# Altium PCB Template2.PcbDoc (part 2 of 2)
Units mm, origin at the board's own origin, x right, y up, seen from the top; angles counter-clockwise.
Board outline 93 x 70 mm, 4 copper layers (Top Layer, InternalPlane1, InternalPlane2, Bottom Layer), stack 1.963 mm thick; 187 components, 125 nets, 602 pads, 560 vias.
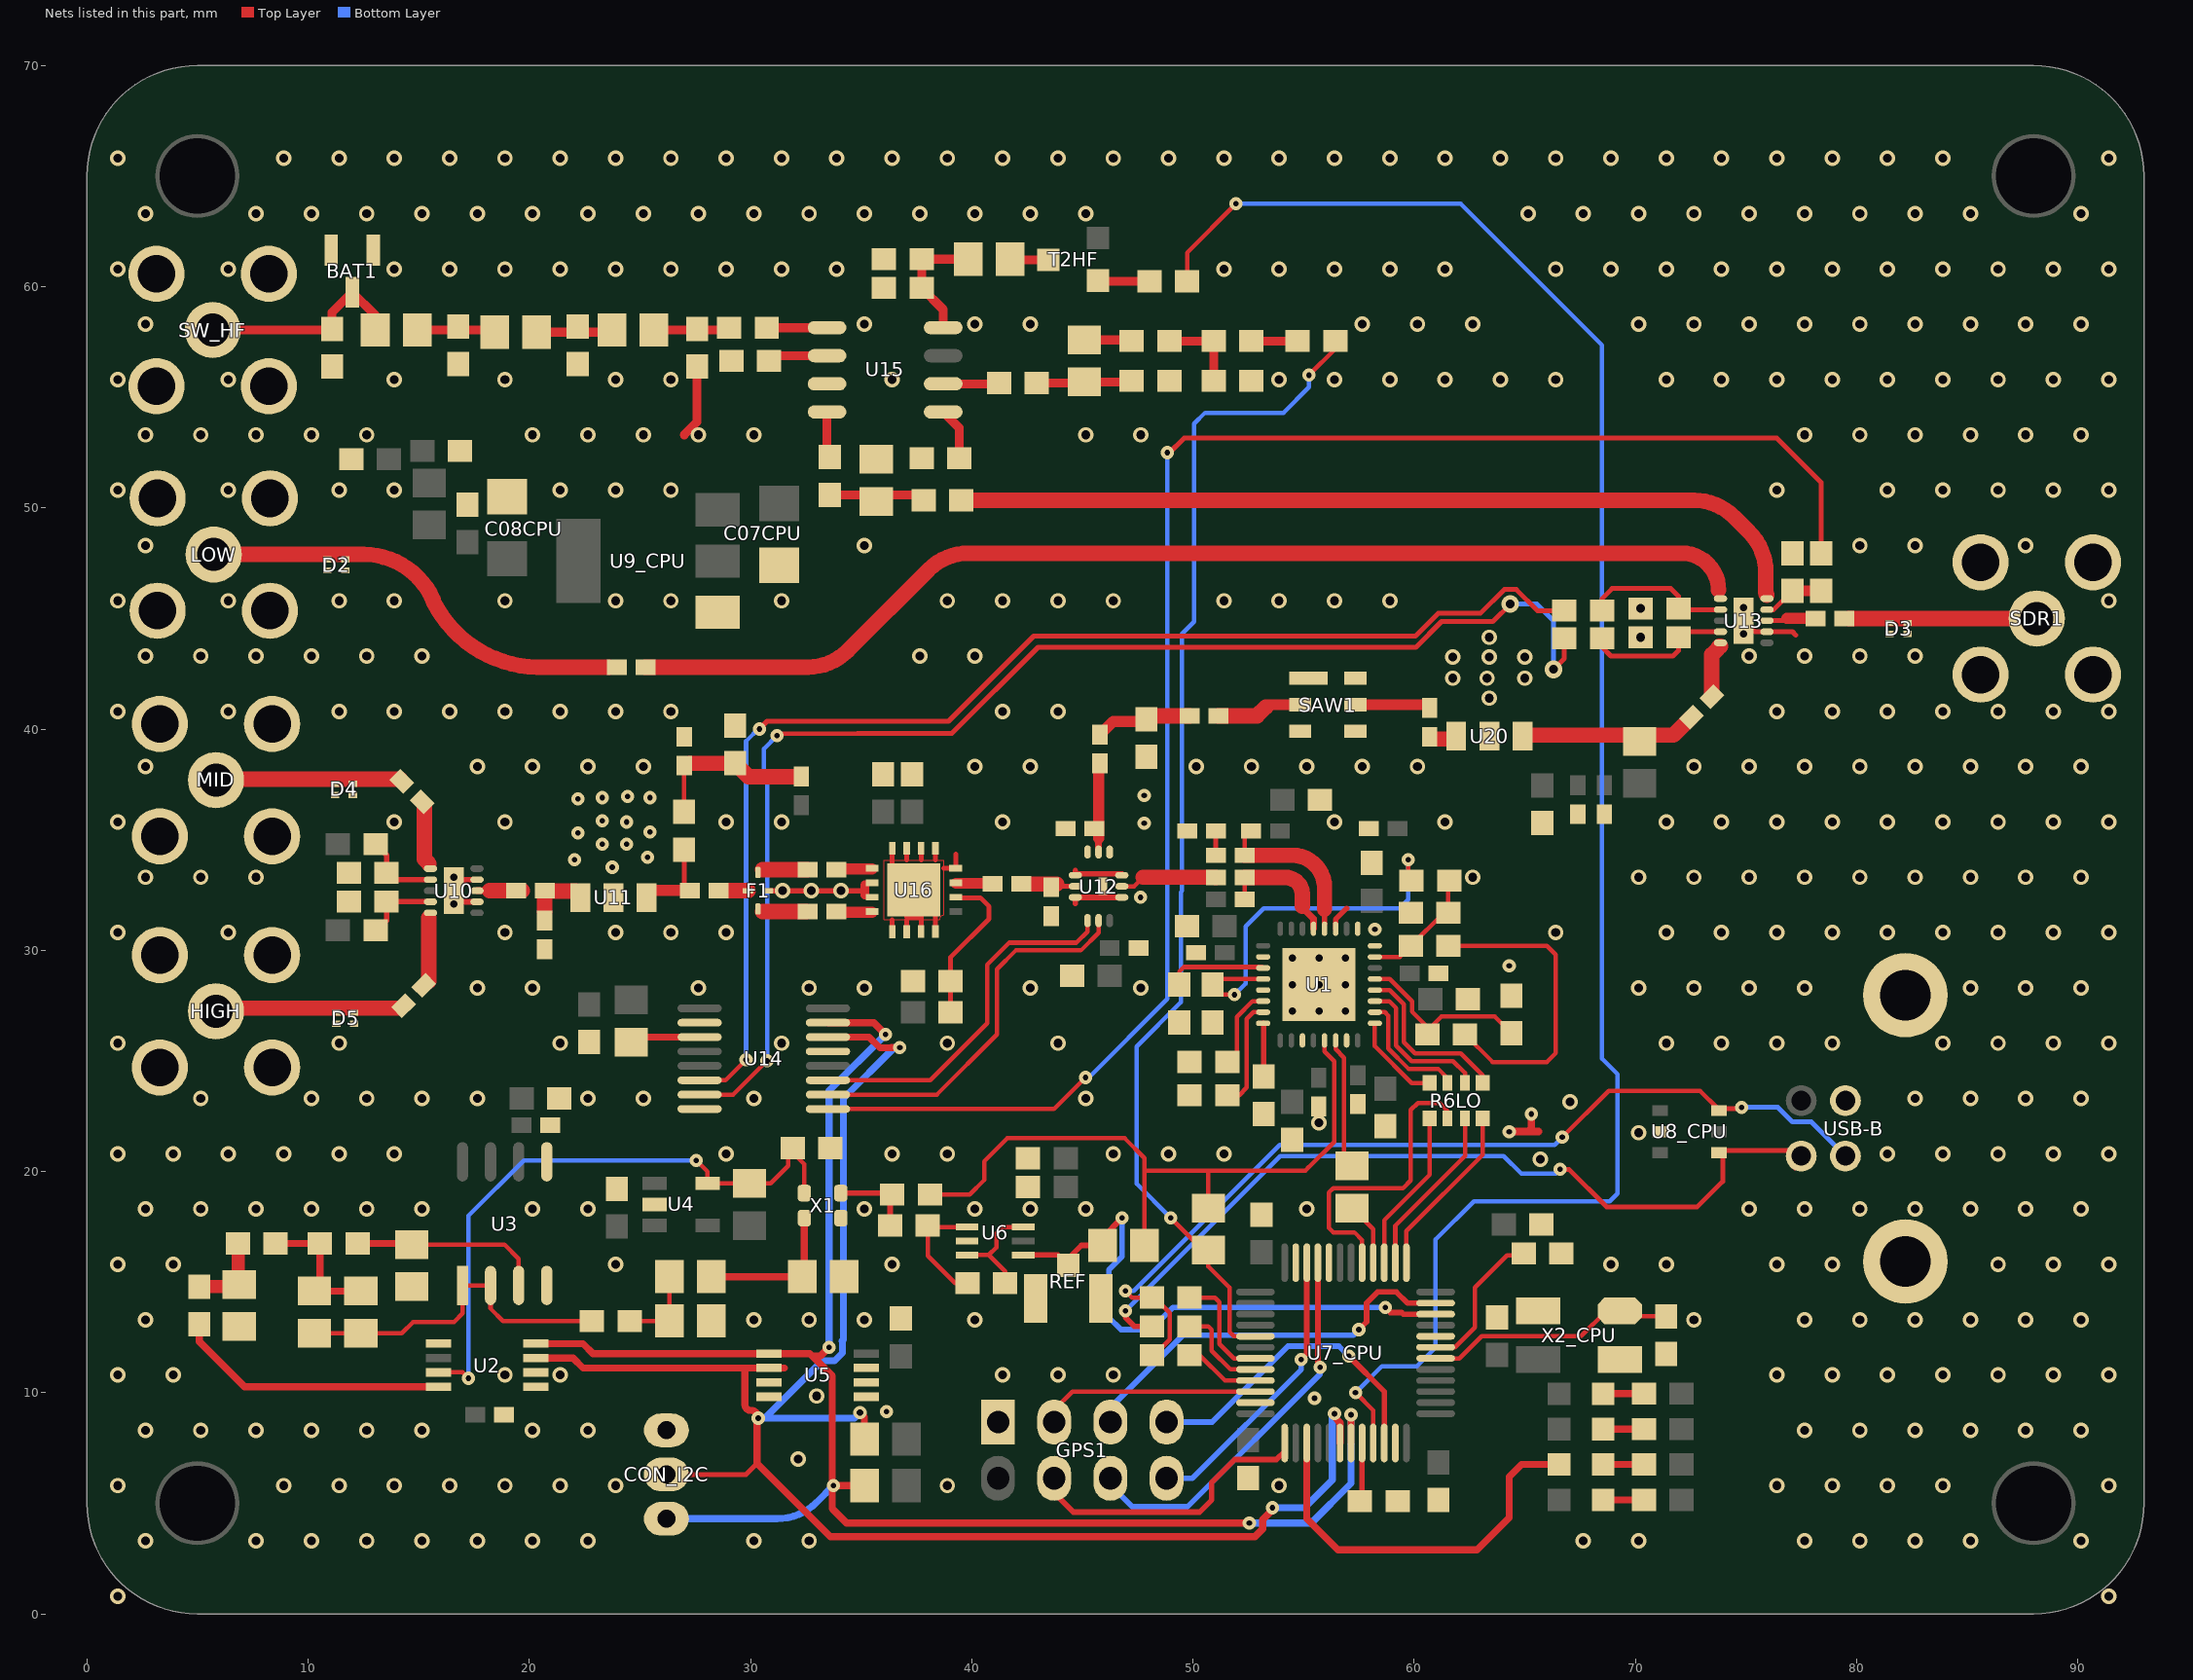
[diagram p4: the nets of this part, all layers, seen from the top]

## Via types
v1: diameter 0.7, hole 0.4, Top Layer to Bottom Layer, 458 vias
v2: diameter 0.6, hole 0.25, Top Layer to Bottom Layer, 82 vias
v3: diameter 0.66, hole 0.33, Top Layer to Bottom Layer, tented top, 13 vias
v4: diameter 1.27, hole 0.711, Top Layer to Bottom Layer, 3 vias
v5: diameter 0.8, hole 0.4, Top Layer to Bottom Layer, 2 vias
v6: diameter 0.6, hole 0.3, Top Layer to Bottom Layer, 2 vias

## Nets (pads, with @x,y where several pads share a name; then routed paths per layer and width w, separated by ;. In a path a pad name is that pad's centre, name@x,y a point inside that pad or via, vN(x,y) a via of type N, cw(c..) or ccw(c..) an arc to the next point about the centre after c; other vN are vias at no path point) (continued)
CPU_OSC_OUT: C05CPU.2 U7_CPU.6 X2_CPU.1 | length 10.8
  Top Layer w0.2: U7_CPU.6@60.975,11.55 62.05,11.55 63.05,12.55 67.55,12.55 X2_CPU.1@68.7,13.7 ; X2_CPU.1@69.3,13.7 69.55,13.45 C05CPU.2@71.4,13.45
CPU_RX: GPS1.8 U7_CPU.22 | length 13.1
  Top Layer w0.25: v2(54.9,11.5) 55.15,11.75 U7_CPU.22@55.15,15.875
  Bottom Layer w0.25: GPS1.8@48.81,6.13 49.98,6.13 54.9,11.05 v2(54.9,11.5)
CPU_SCL: CON_I2C.2 R040LO.1 U2.3 U5.2 U7_CPU.42 U14.14 | length 82.8
  Top Layer w0.22: CON_I2C.2@26.2,6.3 29.8,6.3 30.3,6.8
  Top Layer w0.32: U2.3@20.286,11.567 21.983,11.567 22.433,11.117 29.75,11.117 ; v2@30.3,8.85 30.3,6.8 33.61,3.49 52.803,3.49 53.16,3.847 53.16,4.26 53.6,4.7 v2(53.6,4.8) ; v2(30.35,8.85) ccw(c30,8.85) 30,9.2 cw(c30,9.45) 29.75,9.45 29.75,11.117 ; 31.533,11.117 U5.2@30.836,11.117 29.75,11.117 ; U14.14@33.5,26.075 35.362,26.075 35.847,25.59 36.353,25.59 36.363,25.6 v2(36.75,25.6) ; v6(34.95,9.1) 35.15,8.9 R040LO.1@35.15,7.9 ; v2(56.4,9.049) 56.4,8.887 56.65,8.637 U7_CPU.42@56.65,7.725
  Bottom Layer w0.32: v2(30.35,8.85) 30.65,8.85 ; v6(34.95,9.1) 34.7,8.85 30.65,8.85 ; v2(36.75,25.6) 36.5,25.6 34.2,23.3 34.2,12.4 34.131,12.331 34.16,12.303 34.16,11.797 33.803,11.44 33.297,11.44 33.269,11.469 30.65,8.85 ; v2(53.6,4.8) 55.05,4.8 56.3,6.05 v2@56.3,9
CPU_SDA: CON_I2C.1 R041LO.2 U2.4 U5.1 U7_CPU.43 U14.15 | length 76.9
  Top Layer w0.32: U2.4@20.286,12.218 22.432,12.218 22.883,11.767 U5.1@30.836,11.767 32.683,11.767 32.8,11.65 ; U14.15@33.5,26.725 35.575,26.725 v2(36.1,26.2) ; v2(33.55,12.05) 33.15,11.65 32.8,11.65 ; R041LO.2@35.15,5.8 v2@33.7,5.8 ; v2(52.55,4.1) 34.35,4.1 33.7,4.75 v2@33.7,5.8 ; U7_CPU.43@57.15,7.725 v2@57.15,8.799 ; 32.8,11.65 33.7,10.75 v2@33.7,5.8
  Bottom Layer w0.32: CON_I2C.1@26.2,4.3 31.198,4.3 ccw(c31.198,6.84) 32.994,5.044 v2(33.75,5.8) ; v2(33.55,12.05) 33.55,23.65 v2(36.1,26.2) ; v2(52.55,4.1) 55.35,4.1 57.15,5.9 v2@57.15,8.799
  other v2: 57.15,9
CPU_TX: GPS1.6 U7_CPU.21 | length 17.8
  Top Layer w0.25: U7_CPU.21@55.65,15.875 55.65,11.25 v2(55.75,11.15)
  Bottom Layer w0.25: GPS1.6@46.27,6.13 46.27,5.83 47.261,4.839 49.75,4.839 55.75,10.839 v2(55.75,11.15)
CPU_USB_LED: U7_CPU.39 USB.2 | length 18.1
  Top Layer w0.32: U7_CPU.39@55.15,7.725 55.15,4.3 56.55,2.9 62.85,2.9 64.3,4.35 64.3,6.2 64.854,6.754 USB.2@66.555,6.754
CS_PLL: R6LO.5 U7_CPU.14 | length 7.8
  Top Layer w0.2: U7_CPU.14@59.15,15.875 59.15,17.55 62.3,20.7 R6LO.5@62.3,22.4
DAC_VOUT: R014LO.1 U2.8 | length 12.4
  Top Layer w0.32: R014LO.1@5.086,13.092 5.086,12.314 7.134,10.266 U2.8@15.886,10.266
DAC_VOUT_FILTER1: C027LO.2 R014LO.2 R015LO.1 | length 3.7
  Top Layer w0.6: R014LO.2@5.086,14.792 6.786,14.792 6.836,14.842 R015LO.1@6.836,16.742
DAC_VOUT_FILTER2: C021LO.2 C024LO.2 R015LO.2 R016LO.1 | length 6.4
  Top Layer w0.32: R015LO.2@8.536,16.742 R016LO.1@10.536,16.742 10.536,14.842 C021LO.2@10.286,14.592 C024LO.2@12.386,14.592
DAC_VOUT_FILTER3: C025LO.2 L001LO.1 R013LO.2 | length 3.8
  Top Layer w0.2: R013LO.2@24.536,13.242 C025LO.2@26.336,13.242 L001LO.1@26.336,15.242
GND: BAT1.1 BAT1.2 C01CPU.1 C001LO.1 C02CPU.1 C002LO.1 C03CPU.1 C003LO.1 C003Mx.2 C04CPU.1 C004LO.1 C004Mx.2 C05CPU.1 C005LO.1 C005Mx.1 C06CPU.1 C006LO.1 C07CPU.2 C08CPU.2 C008LO.1 C09CPU.1 C009LO.1 C10CPU.1 C010LO.1 C11CPU.1 C011LO.1 C012LO.1 C013LO.1 C014LO.1 C015LO.1 C016LO.1 C018LO.1 C020LO.1 C022LO.1 C023LO.1 C025LO.1 C026LO.1 C027LO.1 C028LO.1 C029LO.1 C031LO.1 C032LO.1 C033LO.1 C035LO.1 C49.1 C50.1 C51.1 C54.1 C60.1 C61.1 C62.1 C64.1 C65.1 C68.1 C69.2 C70.1 C70Mx.2 C71.1 C72.1 C73HF.1 C74HF.1 C78HF.1 C79HF.1 C80HF.2 C82HF.1 C85.1 C86.1 CON_I2C.3 D2.1 D2.2 D3.1 D3.2 D4.1 D4.2 D5.1 D5.2 F1.4 GPS1.1 HIGH.2 HIGH.3 HIGH.4 HIGH.5 L6Mx.1 L9HF.1 LOW.2 LOW.3 LOW.4 LOW.5 MID.2 MID.3 MID.4 MID.5 R001LO.1 R05CPU.1 R009LO.1 R34HF.1 R35HF.1 R37HF.2 R38HF.2 R039LO.1 REF.0 SAW1.1 SAW1.3 SAW1.4 SAW1.6 SDR1.2 SDR1.3 SDR1.4 SDR1.5 SW_HF.2 SW_HF.3 SW_HF.4 SW_HF.5 U1.8 U1.9 U1.11 U1.18 U1.21 U1.27 U1.31 U1.33 U2.1 U2.2 U2.5 U3.4 U3.5 U4.2 U5.3 U5.4 U5.5 U5.6 U5.7 U6.2 U7_CPU.8 U7_CPU.20 U7_CPU.23 U7_CPU.35 U7_CPU.47 U8_CPU.2 U9_CPU.1 U10.7 U10.9 U10.11 U11.2 U12.1 U12.3 U12.4 U12.6 U12.10 U12.12 U12.13 U13.7 U13.11 U14.2 U14.8 U14.13 U15.3 U16.4 U16.5 U16.6 U16.7 U16.8 U16.10 U16.11 U16.13 U16.14 U16.15 U16.16 U16.17 U20.2 USB-B.4 USB-B.5 USB-B.6 X1.2 X2_CPU.2 X2_CPU.4 | length 31.5
  Top Layer w0.22: 35.175,32.425 35.175,32.7 35.175,32.95 ; U16.13@36.412,30.838 36.412,31.377 ; U16.8@36.412,34.614 36.412,34.077 36.412,32.727 37.062,32.727 37.062,31.5 37.713,31.5 37.713,31.377 U16.15@37.713,30.84 ; U16.14@37.062,30.838 37.062,31.377 ; 37.062,34.077 U16.7@37.062,34.614 ; 37.712,34.077 U16.6@37.712,34.614 ; U16.16@38.362,30.839 38.362,31.377 38.362,31.524 ; 38.362,34.077 U16.5@38.362,34.612 ; 38.737,33.702 U16.4@39.274,33.702 39.274,34.35 ; C011LO.1@55.686,22.942 55.686,22.234 ccw(c55.734,22.234) v1(55.7,22.2) ; U13.11@74.9,44.9 75.4,44.4 U13.7@75.95,44.4 77.1,44.4 77.25,44.25
  Top Layer w0.25: U10.11@16.586,32.692 17.086,33.192 U10.9@17.636,33.192 ; 17.086,32.192 U10.7@17.636,32.192 ; F1.4@30.786,32.692 35.175,32.692 ; 44.686,32.114 U12.6@44.686,32.392 U12.10@46.786,32.392 ; 44.686,33.6 44.694,33.452 U12.12@46.794,33.452 ; v2@47.641,32.311 47.674,32.311 v2@47.684,32.3 ; U1.11@56.45,30.975 56.45,31.4 56.95,31.9
  Top Layer w0.35: v2(64.3,21.8) 65.625,21.8 ; 65.15,21.8 65.3,21.95 v2(65.3,22.6)
  Top Layer w0.4: 27,53.3 27.586,53.886 R34HF.1@27.586,56.392 ; 35.175,32.5 35.175,32.95
  other v1: 1.4,0.8 91.4,0.8 2.65,3.3 7.65,3.3 10.15,3.3 12.65,3.3 15.15,3.3 17.65,3.3 20.15,3.3 22.65,3.3 30.15,3.3 32.65,3.3 67.65,3.3 70.15,3.3 77.65,3.3 80.15,3.3 82.65,3.3 85.15,3.3 90.15,3.3 1.4,5.8 8.9,5.8 11.4,5.8 13.9,5.8 16.4,5.8 18.9,5.8 21.4,5.8 23.9,5.8 38.9,5.8 53.9,5.8 76.4,5.8 78.9,5.8 81.4,5.8 83.9,5.8 91.4,5.8 32.15,7 2.65,8.3 5.15,8.3 7.65,8.3 10.15,8.3 12.65,8.3 15.15,8.3 20.15,8.3 22.65,8.3 77.65,8.3 80.15,8.3 82.65,8.3 85.15,8.3 87.65,8.3 90.15,8.3 33,9.85 1.4,10.8 3.9,10.8 18.9,10.8 21.4,10.8 41.4,10.8 43.9,10.8 46.4,10.8 76.4,10.8 78.9,10.8 81.4,10.8 83.9,10.8 86.4,10.8 88.9,10.8 91.4,10.8 2.65,13.3 30.15,13.3 32.65,13.3 35.15,13.3 40.15,13.3 72.65,13.3 77.65,13.3 80.15,13.3 82.65,13.3 85.15,13.3 87.65,13.3 90.15,13.3 1.4,15.8 3.9,15.8 23.9,15.8 36.4,15.8 68.9,15.8 71.4,15.8 76.4,15.8 78.9,15.8 86.4,15.8 88.9,15.8 91.4,15.8 2.65,18.3 5.15,18.3 7.65,18.3 10.15,18.3 12.65,18.3 15.15,18.3 20.15,18.3 22.65,18.3 35.15,18.3 40.15,18.3 42.65,18.3 45.15,18.3 55.15,18.3 75.15,18.3 77.65,18.3 80.15,18.3 82.65,18.3 85.15,18.3 87.65,18.3 90.15,18.3 65.7,20.55 1.4,20.8 3.9,20.8 6.4,20.8 8.9,20.8 11.4,20.8 13.9,20.8 28.9,20.8 36.4,20.8 38.9,20.8 46.4,20.8 48.9,20.8 51.4,20.8 81.4,20.8 83.9,20.8 86.4,20.8 88.9,20.8 91.4,20.8 70.15,21.75 67.05,23.15 5.15,23.3 10.15,23.3 12.65,23.3 15.15,23.3 17.65,23.3 22.65,23.3 25.15,23.3 30.15,23.3 45.15,23.3 82.65,23.3 85.15,23.3 87.65,23.3 90.15,23.3 1.4,25.8 11.4,25.8 21.4,25.8 31.4,25.8 38.9,25.8 43.9,25.8 71.4,25.8 73.9,25.8 76.4,25.8 78.9,25.8 83.9,25.8 86.4,25.8 88.9,25.8 91.4,25.8 17.65,28.3 20.15,28.3 27.65,28.3 32.65,28.3 35.15,28.3 42.65,28.3 47.65,28.3 70.15,28.3 72.65,28.3 75.15,28.3 77.65,28.3 85.15,28.3 87.65,28.3 90.15,28.3 1.4,30.8 6.4,30.8 18.9,30.8 23.9,30.8 26.4,30.8 28.9,30.8 66.4,30.8 71.4,30.8 73.9,30.8 76.4,30.8 78.9,30.8 81.4,30.8 83.9,30.8 86.4,30.8 88.9,30.8 91.4,30.8 31.45,32.692 32.75,32.7 34.1,32.692 2.65,33.3 5.15,33.3 7.65,33.3 62.65,33.3 70.15,33.3 72.65,33.3 75.15,33.3 77.65,33.3 80.15,33.3 82.65,33.3 85.15,33.3 87.65,33.3 90.15,33.3 1.4,35.8 13.9,35.8 18.9,35.8 28.9,35.8 31.4,35.8 41.4,35.8 56.4,35.8 61.4,35.8 71.4,35.8 73.9,35.8 76.4,35.8 78.9,35.8 81.4,35.8 83.9,35.8 86.4,35.8 88.9,35.8 91.4,35.8 2.65,38.3 17.65,38.3 20.15,38.3 22.65,38.3 25.15,38.3 40.15,38.3 42.65,38.3 50.15,38.3 52.65,38.3 55.15,38.3 57.65,38.3 60.15,38.3 72.65,38.3 75.15,38.3 77.65,38.3 80.15,38.3 82.65,38.3 85.15,38.3 87.65,38.3 90.15,38.3 1.4,40.8 6.4,40.8 11.4,40.8 13.9,40.8 16.4,40.8 18.9,40.8 21.4,40.8 23.9,40.8 26.4,40.8 41.4,40.8 43.9,40.8 76.4,40.8 78.9,40.8 81.4,40.8 83.9,40.8 86.4,40.8 88.9,40.8 91.4,40.8 63.4,41.4 61.75,42.3 63.3,42.3 65,42.3 61.75,43.25 63.4,43.25 65,43.25 2.65,43.3 5.15,43.3 7.65,43.3 10.15,43.3 12.65,43.3 15.15,43.3 37.65,43.3 40.15,43.3 75.15,43.3 77.65,43.3 80.15,43.3 82.65,43.3 63.4,44.15 70.246,44.15 70.246,45.45 1.4,45.8 6.4,45.8 11.4,45.8 13.9,45.8 18.9,45.8 23.9,45.8 26.4,45.8 31.4,45.8 38.9,45.8 41.4,45.8 43.9,45.8 46.4,45.8 51.4,45.8 53.9,45.8 56.4,45.8 58.9,45.8 91.4,45.8 2.65,48.3 35.15,48.3 80.15,48.3 82.65,48.3 87.65,48.3 1.4,50.8 6.4,50.8 11.4,50.8 13.9,50.8 21.4,50.8 23.9,50.8 26.4,50.8 76.4,50.8 81.4,50.8 83.9,50.8 86.4,50.8 88.9,50.8 91.4,50.8 2.65,53.3 5.15,53.3 7.65,53.3 10.15,53.3 12.65,53.3 20.15,53.3 22.65,53.3 25.15,53.3 27.65,53.3 30.15,53.3 45.15,53.3 47.65,53.3 77.65,53.3 80.15,53.3 82.65,53.3 85.15,53.3 87.65,53.3 90.15,53.3 1.4,55.8 6.4,55.8 13.9,55.8 18.9,55.8 23.9,55.8 26.4,55.8 36.4,55.8 53.9,55.8 56.4,55.8 58.9,55.8 61.4,55.8 63.9,55.8 66.4,55.8 71.4,55.8 73.9,55.8 76.4,55.8 78.9,55.8 81.4,55.8 83.9,55.8 86.4,55.8 88.9,55.8 91.4,55.8 2.65,58.3 35.15,58.3 40.15,58.3 42.65,58.3 57.65,58.3 60.15,58.3 62.65,58.3 70.15,58.3 72.65,58.3 75.15,58.3 77.65,58.3 80.15,58.3 82.65,58.3 85.15,58.3 87.65,58.3 90.15,58.3 1.4,60.8 6.4,60.8 13.9,60.8 16.4,60.8 18.9,60.8 21.4,60.8 23.9,60.8 26.4,60.8 28.9,60.8 31.4,60.8 33.9,60.8 51.4,60.8 53.9,60.8 56.4,60.8 58.9,60.8 61.4,60.8 66.4,60.8 68.9,60.8 71.4,60.8 73.9,60.8 76.4,60.8 78.9,60.8 81.4,60.8 83.9,60.8 86.4,60.8 88.9,60.8 91.4,60.8 2.65,63.3 7.65,63.3 10.15,63.3 12.65,63.3 15.15,63.3 17.65,63.3 20.15,63.3 22.65,63.3 25.15,63.3 27.65,63.3 30.15,63.3 32.65,63.3 35.15,63.3 37.65,63.3 40.15,63.3 42.65,63.3 45.15,63.3 65.15,63.3 67.65,63.3 70.15,63.3 72.65,63.3 75.15,63.3 77.65,63.3 80.15,63.3 82.65,63.3 85.15,63.3 90.15,63.3 1.4,65.8 8.9,65.8 11.4,65.8 13.9,65.8 16.4,65.8 18.9,65.8 21.4,65.8 23.9,65.8 26.4,65.8 28.9,65.8 31.4,65.8 33.9,65.8 36.4,65.8 38.9,65.8 41.4,65.8 43.9,65.8 46.4,65.8 48.9,65.8 51.4,65.8 53.9,65.8 56.4,65.8 58.9,65.8 61.4,65.8 63.9,65.8 66.4,65.8 68.9,65.8 71.4,65.8 73.9,65.8 76.4,65.8 78.9,65.8 81.4,65.8 83.9,65.8 91.4,65.8
  other v2: 36.15,9.15 55.5,9.75 64.3,29.3 58.225,30.95 47.636,32.392 23.75,33.75 22.05,34.1 25.35,34.2 23.3,34.8 24.4,34.8 22.2,35.3 25.45,35.35 47.8,35.75 24.4,35.8 23.3,35.85 22.2,36.85 23.3,36.9 25.45,36.9 24.45,36.95 47.8,37
  other v3: 54.5,27.25 55.7,27.25 56.9,27.25 54.5,28.45 55.7,28.45 56.9,28.45 54.5,29.65 55.7,29.65 56.9,29.65 16.586,32.092 16.586,33.292 74.9,44.3 74.9,45.5
GPS_RST: GPS1.7 U7_CPU.46 | length 14.4
  Top Layer w0.25: v2(57.05,11.65) 58.65,10.05 U7_CPU.46@58.65,7.725
  Bottom Layer w0.25: GPS1.7@48.81,8.67 50.87,8.67 54.3,12.1 56.6,12.1 v2(57.05,11.65)
LO+: C007LO.2 U12.11 | length 4.4
  Top Layer w0.2: U12.11@46.786,32.892 47.342,32.892 47.75,33.3
  Top Layer w0.7: 47.75,33.3 51.028,33.3 C007LO.2@51.036,33.292
LO-: C017LO.2 R009LO.2 | length 1.1
  Top Layer w0.22: C017LO.2@51.036,34.292 R009LO.2@51.036,35.392
MCO: C83HF.2 R002LO.2 U7_CPU.29 | length 53.4
  Top Layer w0.2: v2(49,17.9) 50.45,16.45 R002LO.2@50.7,16.45 50.7,15.7 51.65,14.75 51.65,12.75 51.85,12.55 U7_CPU.29@52.825,12.55 ; v2(55.25,56) C83HF.2@56.436,57.186
  Bottom Layer w0.2: v2(49,17.9) 47.45,19.45 47.45,25.65 49.45,27.65 49.45,32.628 49.5,32.678 49.5,44.3 50.05,44.85 50.05,53.8 50.55,54.3 54.1,54.3 55.25,55.45 v2(55.25,56)
MIX_EN: U12.7 U14.11 | length 16.6
  Top Layer w0.2: U14.11@33.5,24.125 38.125,24.125 40.7,26.7 40.7,29.35 41.692,30.342 44.736,30.342 45.236,30.842 U12.7@45.236,31.342
MIX_X2: U12.8 U14.10 | length 17.5
  Top Layer w0.2: U14.10@33.5,23.475 38.425,23.475 41.15,26.2 41.15,29.15 41.992,29.992 44.936,29.992 45.736,30.792 U12.8@45.736,31.342
Mixer_switch_in: C002Mx.2 U13.5 | length 2.5
  Top Layer w0.7: C002Mx.2@73.46,41.46 73.46,43.36 73.75,43.65 cw(c73.85,43.65) 73.85,43.75
MOSI: R6LO.3 U7_CPU.17 | length 13.7
  Top Layer w0.2: U7_CPU.17@57.65,15.875 57.65,16.9 57.3,17.25 56.35,17.25 56.15,17.45 56.15,19.054 56.346,19.25 59.5,19.25 59.85,19.6 59.85,22.778 60.172,23.1 61.15,23.1 61.5,22.75 R6LO.3@61.5,22.4
NetC001Mx_1: C001Mx.1 SAW1.5 | length 3.3
  Top Layer w0.5: SAW1.5@57.5,41.1 60.45,41.1 C001Mx.1@60.7,40.85
NetC001Mx_2: C001Mx.2 U20.1 | length 1.3
  Top Layer w0.22: U20.1@61.775,39.55 U20.1@61.9,39.675
  Top Layer w0.7: C001Mx.2@60.7,39.55 U20.1@61.775,39.55
NetC002Mx_1: C002Mx.1 L5Mx.1 U20.3 | length 7.8
  Top Layer w0.7: U20.3@65.1,39.725 71.725,39.725 C002Mx.1@72.54,40.54
NetC06CPU_2: C06CPU.2 U7_CPU.7 | length 6.7
  Top Layer w0.2: U7_CPU.7@60.975,12.05 61.85,12.05 62.75,12.95 62.75,14.75 64.2,16.2 C06CPU.2@64.95,16.2
NetC006Mx_1: C006Mx.1 C59.2 L6Mx.2 | length 4
  Top Layer w0.5: C59.2@45.8,39.75 46.4,40.35 L6Mx.2@48.104,40.35
  Top Layer w0.7: L6Mx.2@48.354,40.6 C006Mx.1@49.85,40.6
NetC006Mx_2: C006Mx.2 SAW1.2 | length 3.6
  Top Layer w0.5: 53.33,41.1 SAW1.2@54.6,41.1
  Top Layer w0.7: C006Mx.2@51.15,40.6 52.9,40.6 53.3,41
NetC014LO_2: C014LO.2 U1.23 | length 5
  Top Layer w0.2: C014LO.2@51.55,23.45 52.094,23.45 52.436,23.792 52.436,26.892 52.744,27.2 U1.23@53.175,27.2
NetC015LO_2: C015LO.2 U1.19 | length 4.5
  Top Layer w0.2: C015LO.2@49.386,28.442 49.386,29.042 49.586,29.242 53.133,29.242 U1.19@53.175,29.2
NetC016LO_2: C016LO.2 U1.24 | length 2.4
  Top Layer w0.25: U1.24@53.175,26.7 53.2,26.675 C016LO.2@53.2,24.3
NetC018LO_2: C018LO.2 C019LO.2 R010LO.1 U1.7 | length 5.7
  Top Layer w0.2: U1.7@58.225,29.7 59.35,29.7 C019LO.2@59.85,30.2 61.35,31.7 C018LO.2@61.55,31.7 61.536,31.714 R010LO.1@61.536,33.192
NetC019LO_1: C019LO.1 R011LO.2 | length 14.2
  Top Layer w0.2: C019LO.1@61.55,30.2 66,30.2 66.4,29.8 66.4,25.35 66,24.95 63.55,24.95 R011LO.2@62.3,26.2
NetC49_2: C49.2 C70Mx.1 L4.2 R_U11pol.2 | length 7.7
  Top Layer w0.2: L4.2@26.886,36.242 L4.2@26.944,36.3 ; L4.2@27,36.25 27,37.867 cw(c27.824,37.867) C70Mx.1@27.241,38.45
  Top Layer w0.7: C70Mx.1@27.241,38.45 C49.2@29.3,38.45 29.9,37.85 R_U11pol.2@32.3,37.85
NetC52_1: C52.1 U10.5 | length 2.9
  Top Layer w0.7: C52.1@15.45,28.6 15.45,31.456
NetC52_2: C52.2 D5.3 D5.4 HIGH.1 | length 8.3
  Top Layer w0.7: HIGH.1@5.836,27.242 5.976,27.382 C52.2@14.046,27.382
NetC53_1: C53.1 F1.1 | length 2
  Top Layer w0.7: 30.55,33.642 C53.1@32.586,33.642
NetC53_2: C53.2 U16.9 | length 1.6
  Top Layer w0.22: C53.2@33.886,33.642 C53.2@33.919,33.675
  Top Layer w0.5: C53.2@33.919,33.675 U16.9@35.5,33.675
NetC55_1: C55.1 U10.8 | length 2.1
  Top Layer w0.3: U10.8@17.636,32.692 18.205,32.692
  Top Layer w0.7: 18.205,32.692 C55.1@19.4,32.692 C55.1@19.686,32.692
NetC55_2: C55.2 C60.2 U11.1 | length 2.3
  Top Layer w0.22: C55.2@20.7,32.65 20.725,32.675 20.717,32.675 C55.2@20.7,32.692
  Top Layer w0.7: C60.2@20.7,31.75 C55.2@20.7,32.65 ; C55.2@20.725,32.675 U11.1@22.1,32.675
NetC56_1: C56.1 L4.1 U11.3 | length 3.4
  Top Layer w0.22: C56.1@26.886,32.7 ccw(c26.611,32.975) 27,32.975 L4.1@27,34.55
  Top Layer w0.5: U11.3@25.35,32.7 C56.1@26.886,32.7
NetC56_2: C56.2 F1.2 | length 1.3
  Top Layer w0.7: C56.2@28.55,32.692 F1.2@29.886,32.692
NetC57_1: C57.1 F1.3 | length 2
  Top Layer w0.7: 30.55,31.75 C57.1@32.536,31.75
NetC57_2: C57.2 U16.12 | length 1.6
  Top Layer w0.22: C57.2@33.875,31.75 C57.2@33.9,31.725
  Top Layer w0.5: C57.2@33.9,31.725 U16.12@35.5,31.725
NetC58_1: C58.1 U16.3 | length 1.7
  Top Layer w0.22: C58.1@40.825,33.025 C58.1@40.95,32.9
  Top Layer w0.5: U16.3@39.3,33.025 C58.1@40.825,33.025
NetC58_2: C58.2 C62.2 U12.5 | length 2.7
  Top Layer w0.22: C62.2@43.6,32.85 cw(c43.701,32.749) 43.701,32.892 U12.5@44.686,32.892
  Top Layer w0.7: C58.2@42.25,32.992 C62.2@43.85,32.992
NetC59_1: C59.1 C61.2 U12.2 | length 3.8
  Top Layer w0.3: U12.2@45.736,34.442 45.736,35.064
  Top Layer w0.5: 45.736,35.064 C59.1@45.736,38.25
NetC63_1: C63.1 U10.1 | length 2.7
  Top Layer w0.7: C63.1@15.25,36.55 15.25,34.128 15.464,33.914
NetC63_2: C63.2 D4.3 D4.4 MID.1 | length 8.3
  Top Layer w0.7: MID.1@5.836,37.692 5.876,37.732 C63.2@14.15,37.732
NetC64_2: C64.2 R8.2 U10.2 | length 3.6
  Top Layer w0.25: R8.2@13.05,34.8 13.55,34.3 C64.2@13.55,33.5 13.858,33.192 U10.2@15.536,33.192
NetC65_2: C65.2 R27.1 U10.4 | length 3.7
  Top Layer w0.25: R27.1@12.85,30.9 R27.1@13.05,30.9 13.1,30.9 13.55,31.35 C65.2@13.55,32.2 15.528,32.2 U10.4@15.536,32.192
NetC66_1: C66.1 D2.3 D2.4 LOW.1 | length 20.6
  Top Layer w0.7: LOW.1@5.736,47.892 12.208,47.892 cw(c12.483,44.425) 15.657,45.848 ; 15.503,46.128 ccw(c20.475,48.167) 20.75,42.8 ; 20.35,42.8 20.75,42.8 C66.1@23.6,42.8
NetC66_2: C66.2 U13.1 | length 51.8
  Top Layer w0.22: U13.1@73.85,45.9 73.85,46.285 ; 73.85,46.4 cw(c73.9,46.4) 73.9,46.45
  Top Layer w0.7: C66.2@25.25,42.8 32.598,42.8 ccw(c32.598,45.34) 34.394,43.544 38.056,47.206 cw(c39.852,45.41) 39.852,47.95 72.1,47.95 cw(c72.1,46.286) 73.764,46.286
NetC67_1: C67.1 U13.8 | length 2.2
  Top Layer w0.22: U13.8@75.95,44.9 76.75,44.9 76.85,45
  Top Layer w0.5: 76.85,45 C67.1@78.15,45
NetC67_2: C67.2 D3.3 D3.4 SDR1.1 | length 8.6
  Top Layer w0.22: SDR1.1@87.7,45 SDR1.1@88.15,45
  Top Layer w0.7: C67.2@79.65,45 87.7,45 SDR1.1@87.8,44.9
NetC70_2: C70.2 R28.2 U13.4 | length 6.9
  Top Layer w0.22: R28.2@68.491,44.1 68.491,43.709 68.9,43.3 71.7,43.3 71.946,43.546 C70.2@71.946,44.15 71.946,44.4 U13.4@73.85,44.4
NetC71_2: C71.2 R30.2 U13.2 | length 6.8
  Top Layer w0.22: R30.2@68.491,45.354 68.491,45.891 68.95,46.35 71.6,46.35 71.946,46.004 C71.2@71.946,45.45 71.996,45.4 U13.2@73.85,45.4
NetC72_2: C72.2 R32.2 U13.9 | length 2.8
  Top Layer w0.22: U13.9@75.95,45.4 76.25,45.4 C72.2@77.1,46.25
  Top Layer w0.5: C72.2@77.1,46.25 R32.2@78.4,46.25
NetC73HF_2: C73HF.2 C74HF.2 L5HF.1 U15.8 | length 5.6
  Top Layer w0.4: U15.8@38.711,58.147 38.711,58.967 C73HF.2@37.736,59.942 C74HF.2@37.736,61.242 L5HF.1@39.836,61.242
NetC75HF_2: C75HF.2 L8HF.1 R34HF.2 | length 3.4
  Top Layer w0.4: L8HF.1@25.636,58.042 28.936,58.042 C75HF.2@29.036,58.142
NetC76HF_2: C76HF.2 C77HF.1 L9HF.2 | length 4.4
  Top Layer w0.4: C76HF.2@33.586,50.592 37.586,50.592 C77HF.1@37.836,50.342
NetC78HF_2: C78HF.2 L6HF.1 L7HF.2 | length 3.5
  Top Layer w0.4: L6HF.1@14.936,58.042 18.336,58.042 L7HF.2@18.436,57.942
NetC79HF_2: C79HF.2 L7HF.1 L8HF.2 | length 3.4
  Top Layer w0.4: L7HF.1@20.336,57.942 23.636,57.942 L8HF.2@23.736,58.042
NetC83HF_1: C83HF.1 R36HF.2 | length 2.1
  Top Layer w0.4: R36HF.2@52.636,57.542 C83HF.1@54.736,57.542
NetC84HF_1: C84HF.1 L10HF.2 | length 2.2
  Top Layer w0.4: L10HF.2@45.086,57.592 47.186,57.592 C84HF.1@47.236,57.542
NetC84HF_2: C84HF.2 R36HF.1 R37HF.1 | length 3.8
  Top Layer w0.4: C84HF.2@48.936,57.542 R36HF.1@50.936,57.542 R37HF.1@50.936,55.742
NetCLK_1: CLK.1 R01CPU.1 | length 1.9
  Top Layer w0.32: CLK.1@68.537,5.154 R01CPU.1@70.396,5.154
NetL5HF_2: L5HF.2 T2HF.3 | length 1.7
  Top Layer w0.4: L5HF.2@41.736,61.242 41.761,61.217 T2HF.3@43.468,61.217
NetLOCK_1: LOCK.1 R03CPU.1 | length 1.9
  Top Layer w0.32: LOCK.1@68.537,8.354 R03CPU.1@70.396,8.354
NetMIX_1: MIX.1 R04CPU.1 | length 1.9
  Top Layer w0.32: MIX.1@68.537,9.954 R04CPU.1@70.396,9.954
NetR001LO_2: R001LO.2 U1.22 | length 3.7
  Top Layer w0.2: R001LO.2@51.55,24.95 51.986,25.386 51.986,26.992 52.694,27.7 U1.22@53.175,27.7
NetR02CPU_1: R02CPU.1 USB.1 | length 1.9
  Top Layer w0.32: USB.1@68.537,6.754 R02CPU.1@70.396,6.754
NetR003LO_2: R003LO.2 U1.30 | length 6
  Top Layer w0.2: U1.30@56.45,25.925 56.45,25.528 56.836,25.142 56.836,20.614 R003LO.2@57.2,20.25
NetR05CPU_2: R05CPU.2 U7_CPU.44 | length 2.7
  Top Layer w0.25: R05CPU.2@57.55,5.1 57.65,5.2 U7_CPU.44@57.65,7.725
NetR6LO_2: R6LO.2 U1.1 | length 4.2
  Top Layer w0.2: U1.1@58.225,26.7 58.225,25.668 59.893,24 R6LO.2@60.7,24
NetR6LO_4: R6LO.4 U1.2 | length 5.6
  Top Layer w0.2: U1.2@58.225,27.2 58.678,27.2 58.836,27.042 58.836,25.552 59.746,24.642 61.087,24.642 61.5,24.229 R6LO.4@61.5,24
NetR6LO_6: R6LO.6 U1.3 | length 6.9
  Top Layer w0.2: U1.3@58.225,27.7 58.878,27.7 59.186,27.392 59.186,25.697 59.891,24.992 61.758,24.992 62.3,24.45 R6LO.6@62.3,24
NetR6LO_8: R6LO.8 U1.4 | length 7.8
  Top Layer w0.2: U1.4@58.225,28.2 58.901,28.2 59.536,27.565 59.536,25.842 60.036,25.342 62.108,25.342 63.1,24.35 R6LO.8@63.1,24
NetR31_2: R31.2 U14.3 | length 3.2
  Top Layer w0.3: R31.2@24.6,25.85 24.825,26.075 U14.3@27.7,26.075
PLL_EN: R6LO.7 U7_CPU.13 | length 8
  Top Layer w0.2: U7_CPU.13@59.65,15.875 59.65,17.3 63.1,20.75 R6LO.7@63.1,22.4
PLL_MISO: R003LO.1 U7_CPU.16 | length 2.9
  Top Layer w0.2: R003LO.1@57.2,18.35 58.15,17.4 U7_CPU.16@58.15,15.875
PPS_IN: GPS1.5 U7_CPU.11 | length 18.2
  Top Layer w0.25: v2(57.5,12.85) 57.85,13.2 57.85,14.05 58.35,14.55 59.2,14.55 59.7,14.05 U7_CPU.11@60.975,14.05
  Bottom Layer w0.25: GPS1.5@46.27,8.67 46.27,9.32 49.55,12.6 57.25,12.6 v2(57.5,12.85)
REF_CLK_IN: R018LO.2 REF.1 U6.4 U7_CPU.10 | length 25.9
  Top Layer w0.25: U6.4@42.331,16.222 43.899,16.222 44.21,15.91 44.957,16.657 R018LO.2@45.911,16.657 45.911,17.011 v2(46.8,17.9) ; v2(58.7,13.85) 58.925,13.625 59.438,13.625 59.513,13.55 U7_CPU.10@60.975,13.55
  Bottom Layer w0.25: v2(46.8,17.9) 46.8,16.15 46.196,15.546 46.196,13.404 46.75,12.85 48.1,12.85 49.1,13.85 v2(58.7,13.85)
REF_PLL: C34LO.2 R002LO.1 R018LO.1 U1.29 | length 31.2
  Top Layer w0.2: C34LO.2@38.111,18.957 39.911,18.957 40.561,19.607 40.561,20.457 41.604,21.5 46.918,21.5 47.811,20.607 47.811,20.1 ; R018LO.1@47.811,16.657 47.811,20.1 ; R002LO.1@50.7,18.35 50.7,20.038 ; U1.29@55.95,25.925 55.95,25.428 56.386,24.992 56.386,21.336 55.256,20.206 55.25,20.206 55.082,20.038 50.7,20.038 ; 47.811,20.1 47.873,20.038 50.7,20.038
REF_VCC: C035LO.2 R012LO.2 U2.7 U4.5 X1.4 | length 28.5
  Top Layer w0.2: U2.7@15.886,10.917 16.983,10.917 v2(17.25,10.65) ; v2(27.55,20.5) 28.05,20 28.05,19.468 U4.5@28.061,19.457 R012LO.2@29.961,19.457 30.916,19.457 31.711,20.252 31.711,21.057 32.436,20.332 X1.4@32.436,19.022
  Bottom Layer w0.2: v2(17.25,10.65) 17.25,18 19.75,20.5 v2(27.55,20.5)
RFOUTA+: C007LO.1 R004LO.1 U1.13 | length 5.8
  Top Layer w0.2: R004LO.1@52.336,32.292 C007LO.1@52.336,33.292
  Top Layer w0.3: 54.95,32 54.95,31.931 55.45,31.431 U1.13@55.45,30.975
  Top Layer w0.7: C007LO.1@52.336,33.292 54.15,33.292 cw(c54.179,32.521) 54.95,32.55 54.95,32
RFOUTA-: C017LO.1 R005LO.1 U1.12 | length 7.3
  Top Layer w0.2: C017LO.1@52.336,34.292 52.336,35.092 R005LO.1@52.636,35.392
  Top Layer w0.25: U1.12@55.95,31.175 55.95,31.85
  Top Layer w0.7: C017LO.1@52.336,34.292 54.5,34.292 ; 54.495,34.292 cw(c54.5,32.842) 54.5,34.292 ; 55.95,31.85 55.95,32.842 ; 55.95,32.847 ccw(c54.5,32.842) 54.5,34.292
SCK: R6LO.1 U7_CPU.15 | length 7.4
  Top Layer w0.2: U7_CPU.15@58.65,15.875 58.65,17.8 60.7,19.85 R6LO.1@60.7,22.4
SMA_SW: BAT1.3 L6HF.2 R35HF.2 SW_HF.1 | length 9.5
  Top Layer w0.4: SW_HF.1@5.686,58.042 R35HF.2@11.036,58.042 ; R35HF.2@11.086,58.092 11.086,58.836 BAT1.3@12,59.75 13.036,58.714 L6HF.2@13.036,58.042
SW_BYPASS: R30.1 U14.6 | length 57.2
  Top Layer w0.2: U14.6@27.7,24.125 28.875,24.125 v2(29.8,25.05)
  Top Layer w0.22: v2(30.4,40) 30.75,40.35 38.95,40.35 42.8,44.2 60.059,44.2 61.089,45.23 62.997,45.23 64.077,46.31 64.623,46.31 65.579,45.354 R30.1@66.791,45.354
  Bottom Layer w0.2: v2(29.8,25.05) 29.8,39.45 30.4,40.05 v2(30.4,40)
SW_MIX: R28.1 U14.7 | length 60.4
  Top Layer w0.2: U14.7@27.7,23.475 29.225,23.475 v2(30.75,25) ; v2(31.2,39.7) 31.3,39.8 34.85,39.8
  Top Layer w0.22: 34.85,39.8 39.1,39.8 43,43.7 60.082,43.7 61.242,44.86 63.56,44.86 v5(64.35,45.65) ; v5(66.3,42.7) 66.791,43.191 R28.1@66.791,44.1
  Bottom Layer w0.2: v2(30.75,25) 30.75,37.9 30.6,38.05 30.6,39.1 v2(31.2,39.7)
  Bottom Layer w0.22: v5(64.35,45.65) 65.55,45.65 66.3,44.9 v5(66.3,42.7)
SW_SW: R32.1 U14.9 | length 75.9
  Top Layer w0.2: U14.9@33.5,22.825 43.725,22.825 v2(45.15,24.25)
  Top Layer w0.22: v2@48.9,52.45 49.6,53.15 76.4,53.15 78.4,51.15 R32.1@78.4,47.95
  Bottom Layer w0.2: v2(45.15,24.25) 45.3,24.25 48.85,27.8 v2(48.85,52.5)
SW_U1: R011LO.1 R039LO.2 U1.5 | length 8.3
  Top Layer w0.2: U1.5@58.225,28.7 58.896,28.7 59.904,27.692 59.904,27.22 60.082,27.042 60.086,27.042 60.6,26.528 R011LO.1@60.6,26.364 ; R011LO.1@60.6,26.2 R011LO.1@60.6,26.364 ; R039LO.2@64.4,26.25 63.65,27 61.236,27 R011LO.1@60.6,26.364
SWCLK: GPS1.4 U7_CPU.37 | length 13.4
  Top Layer w0.25: GPS1.4@43.73,6.13 43.73,5.47 44.6,4.6 50.3,4.6 50.85,5.15 50.85,5.939 51.886,6.975 53.775,6.975 54.15,7.35 U7_CPU.37@54.15,7.725
SWDIO: GPS1.3 U7_CPU.34 | length 10
  Top Layer w0.2: GPS1.3@43.73,8.67 43.73,9.23 44.55,10.05 U7_CPU.34@52.825,10.05
T2_BASE: R33HF.2 T2HF.1 | length 2.3
  Top Layer w0.4: T2HF.1@45.704,60.277 45.738,60.242 R33HF.2@48.036,60.242
TUNE: C020LO.2 R010LO.2 U1.20 | length 17.4
  Top Layer w0.2: C020LO.2@50.886,28.442 51.336,27.992 v2(51.886,27.992) ; C020LO.2@50.95,28.55 51.1,28.7 U1.20@53.175,28.7 ; v2(59.736,34.092) 59.736,33.292 R010LO.2@59.886,33.142
  Bottom Layer w0.2: v2(51.886,27.992) 52.386,28.492 52.386,31.086 53.2,31.9 59.35,31.9 59.736,32.286 v2(59.736,34.092)
U3_IN-: C021LO.1 C024LO.1 R013LO.1 U3.1 U3.2 | length 15.5
  Top Layer w0.2: C021LO.1@10.286,12.692 C024LO.1@12.386,12.692 14.242,12.692 14.75,13.2 16.6,13.2 16.981,13.581 U3.1@16.981,14.848 U3.2@18.251,14.848 18.251,13.799 18.808,13.242 R013LO.1@22.836,13.242
U3_INP: C028LO.2 R016LO.2 U3.3 | length 8.8
  Top Layer w0.2: C028LO.2@14.686,16.692 18.886,16.692 19.521,16.057 U3.3@19.521,14.848
  Top Layer w0.32: R016LO.2@12.236,16.742 14.636,16.742 C028LO.2@14.686,16.692
U6_I1: C030LO.1 R017LO.1 U6.1 | length 5.5
  Top Layer w0.2: U6.1@39.791,17.492 38.076,17.492 C030LO.1@38.011,17.557 38.011,16.19 39.244,14.957 R017LO.1@39.811,14.957
U6_S: R017LO.2 U6.3 U6.6 | length 5
  Top Layer w0.2: U6.3@39.791,16.222 40.776,16.222 ; R017LO.2@41.511,14.957 41.511,15.487 40.776,16.222 ; U6.6@42.331,17.492 41.396,17.492 41.111,17.207 41.111,16.557 40.776,16.222
U15_INA: C75HF.1 U15.1 | length 2.7
  Top Layer w0.4: C75HF.1@30.736,58.142 33.456,58.142 U15.1@33.461,58.147
U15_INB: C80HF.1 U15.2 | length 2.7
  Top Layer w0.4: C80HF.1@30.836,56.642 31.071,56.877 U15.2@33.461,56.877
U15_OSCB: C81HF.1 U15.6 | length 2.5
  Top Layer w0.4: U15.6@38.711,55.607 41.201,55.607 C81HF.1@41.236,55.642
U15_OSCB_FILTERED: C81HF.2 L10HF.1 R38HF.1 | length 4.3
  Top Layer w0.4: C81HF.2@42.936,55.642 45.036,55.642 L10HF.1@45.086,55.692 47.186,55.692 R38HF.1@47.236,55.742
U15_OUTA: C76HF.1 U15.4 | length 2.1
  Top Layer w0.4: U15.4@33.461,54.337 33.461,52.417 C76HF.1@33.586,52.292
U15_OUTB: C82HF.2 U15.5 | length 2.4
  Top Layer w0.4: U15.5@38.711,54.337 39.436,53.612 C82HF.2@39.436,52.242
U16_VCTL: C86.2 R7.2 U16.2 | length 7.2
  Top Layer w0.22: R7.2@39.05,27.2 C86.2@39.05,28.6 39.05,29.687 40.785,31.422 40.785,31.978 40.388,32.375 U16.2@39.275,32.375
UPCONV_EN#: R33HF.1 U7_CPU.45 | length 83.3
  Top Layer w0.2: R33HF.1@49.736,60.242 49.736,61.536 v2(51.95,63.75) ; v2(57.35,10) 58.15,9.2 U7_CPU.45@58.15,7.725
  Bottom Layer w0.2: v2(51.95,63.75) 62.1,63.75 68.5,57.35 68.5,25.1 69.2,24.4 69.2,19 68.85,18.65 62.7,18.65 60.975,16.925 60.975,12.05 60.125,11.2 58.55,11.2 v2(57.35,10)
UPCONV_IN: C77HF.2 U13.10 | length 39.1
  Top Layer w0.7: C77HF.2@39.536,50.342 72.656,50.342 cw(c72.656,47.802) 74.452,49.598 75.156,48.894 cw(c73.36,47.098) 75.9,47.098 75.9,46.171 ; 75.915,46.102 cw(c75.794,45.981) 75.95,46.05
USB_D+: R08CPU.1 U7_CPU.33 | length 3.5
  Top Layer w0.2: R08CPU.1@49.85,11.7 50.3,11.7 51.45,10.55 U7_CPU.33@52.825,10.55
USB_D+_CON: R06CPU.2 R08CPU.2 U8_CPU.6 USB-B.3 | length 42.3
  Top Layer w0.2: v2(46.95,14.6) 47.25,14.3 R06CPU.2@48.15,14.3 48.254,14.3 48.95,13.604 48.95,12.396 48.254,11.7 R08CPU.2@48.15,11.7 ; v2(66.7,21.55) 68.8,23.65 72.925,23.65 U8_CPU.6@73.725,22.85
  Top Layer w0.22: U8_CPU.6@73.725,22.85 74.75,22.85 v2(74.8,22.9)
  Bottom Layer w0.2: v2(46.95,14.6) 47.32,14.6 53.92,21.2 66.35,21.2 v2(66.7,21.55)
  Bottom Layer w0.22: v2(74.8,22.9) 76.444,22.9 77.103,22.241 77.959,22.241 USB-B.3@79.5,20.7
USB_D-: R07CPU.1 U7_CPU.32 | length 4.3
  Top Layer w0.2: R07CPU.1@49.85,13 50.7,13 50.85,12.85 50.85,11.9 51.7,11.05 U7_CPU.32@52.825,11.05
USB_D-_CON: R07CPU.2 U8_CPU.4 USB-B.2 | length 38.7
  Top Layer w0.22: v2(66.6,20.1) 67,20.1 68.7,18.4 72.8,18.4 73.95,19.55 73.95,20.6 ; U8_CPU.4@73.725,20.95 77.25,20.95 USB-B.2@77.5,20.7 USB-B.2@77.204,20.15
  Top Layer w0.25: v2(46.95,13.7) 46.95,13.4 47.35,13 R07CPU.2@48.15,13
  Bottom Layer w0.2: v2(46.95,13.7) 53.95,20.7 64.05,20.7 64.85,19.9 66.4,19.9 v2(66.6,20.1)
USB_EN: R06CPU.1 U7_CPU.31 | length 5.2
  Top Layer w0.2: R06CPU.1@49.85,14.3 51,14.3 51.2,14.1 51.2,12.2 51.85,11.55 U7_CPU.31@52.825,11.55
X1_OUT: C030LO.2 C34LO.1 X1.3 | length 3.7
  Top Layer w0.25: X1.3@34.086,19.022 C34LO.1@36.346,19.022 ; C030LO.2@36.311,17.557 C34LO.1@36.311,18.857 ; C34LO.1@36.311,18.957 C34LO.1@36.411,18.957
X1_VT: C026LO.2 L001LO.2 X1.1 | length 6.8
  Top Layer w0.32: L001LO.2@28.236,15.242 C026LO.2@32.336,15.242 32.436,15.342 X1.1@32.436,17.892
pads on no net: C07CPU.0 C08CPU.0 H1.0 H2.0 H3.0 H4.0 U1.14 U1.15 U1.25 U3.7 U4.1 U6.0 U7_CPU.2 U7_CPU.3 U7_CPU.4 U7_CPU.12 U7_CPU.18 U7_CPU.19 U7_CPU.25 U7_CPU.26 U7_CPU.27 U7_CPU.28 U7_CPU.30 U8_CPU.1 U8_CPU.3 U8_CPU.7 U10.3 U10.6 U10.10 U13.3 U13.6 U15.7

## Polygon pours and split planes (outlines as drawn)
GND on Bottom Layer "GND_L04_P011" (solid, pour order 18): 93,70 93,-0.1 0,-0.1 0,70
GND on Top Layer "GND_L01_P010" (solid, pour order 17): 93,70 93,-0.1 0,-0.1 0,70
GND on InternalPlane1 (split plane): 88.294,69.482 88.586,69.453 88.876,69.406 89.163,69.339 89.444,69.253 89.719,69.15 89.987,69.029 90.246,68.89 90.496,68.735 90.734,68.564 90.962,68.377 91.176,68.176 91.377,67.962 91.564,67.734 91.735,67.496 91.89,67.246 92.029,66.987 92.15,66.719 92.253,66.444 92.339,66.163 92.406,65.876 92.453,65.586 92.482,65.294 92.491,65.018 92.49,65 92.49,5 92.491,4.982 92.482,4.706 92.453,4.414 92.406,4.124 92.339,3.837 92.253,3.556 92.15,3.281 92.029,3.013 91.89,2.754 91.735,2.504 91.564,2.266 91.377,2.038 91.176,1.824 90.962,1.623 90.734,1.436 90.496,1.265 90.246,1.11 89.987,0.971 89.719,0.85 89.444,0.747 89.163,0.661 88.876,0.594 88.586,0.547 88.294,0.518 88.018,0.509 88,0.51 5,0.51 4.982,0.509 4.706,0.518 4.414,0.547 4.124,0.594 3.837,0.661 3.556,0.747 3.281,0.85 3.013,0.971 2.754,1.11 2.504,1.265 2.266,1.436 2.038,1.623 1.824,1.824 1.623,2.038 1.436,2.266 1.265,2.504 1.11,2.754 0.971,3.013 0.85,3.281 0.747,3.556 0.661,3.837 0.594,4.124 0.547,4.414 0.518,4.706 0.509,4.982 0.51,5 0.51,65 0.509,65.018 0.518,65.294 0.547,65.586 0.594,65.876 0.661,66.163 0.747,66.444 0.85,66.719 0.971,66.987 1.11,67.246 1.265,67.496 1.436,67.734 1.623,67.962 1.824,68.176 2.038,68.377 2.266,68.564 2.504,68.735 2.754,68.89 3.013,69.029 3.281,69.15 3.556,69.253 3.837,69.339 4.124,69.406 4.414,69.453 4.706,69.482 4.982,69.491 5,69.49 88,69.49 88.018,69.491
3V3 on InternalPlane2 (split plane): 88.294,69.482 88.586,69.453 88.876,69.406 89.163,69.339 89.444,69.253 89.719,69.15 89.987,69.029 90.246,68.89 90.496,68.735 90.734,68.564 90.962,68.377 91.176,68.176 91.377,67.962 91.564,67.734 91.735,67.496 91.89,67.246 92.029,66.987 92.15,66.719 92.253,66.444 92.339,66.163 92.406,65.876 92.453,65.586 92.482,65.294 92.491,65.018 92.49,65 92.49,5 92.491,4.982 92.482,4.706 92.453,4.414 92.406,4.124 92.339,3.837 92.253,3.556 92.15,3.281 92.029,3.013 91.89,2.754 91.735,2.504 91.564,2.266 91.377,2.038 91.176,1.824 90.962,1.623 90.734,1.436 90.496,1.265 90.246,1.11 89.987,0.971 89.719,0.85 89.444,0.747 89.163,0.661 88.876,0.594 88.586,0.547 88.294,0.518 88.018,0.509 88,0.51 5,0.51 4.982,0.509 4.706,0.518 4.414,0.547 4.124,0.594 3.837,0.661 3.556,0.747 3.281,0.85 3.013,0.971 2.754,1.11 2.504,1.265 2.266,1.436 2.038,1.623 1.824,1.824 1.623,2.038 1.436,2.266 1.265,2.504 1.11,2.754 0.971,3.013 0.85,3.281 0.747,3.556 0.661,3.837 0.594,4.124 0.547,4.414 0.518,4.706 0.509,4.982 0.51,5 0.51,65 0.509,65.018 0.518,65.294 0.547,65.586 0.594,65.876 0.661,66.163 0.747,66.444 0.85,66.719 0.971,66.987 1.11,67.246 1.265,67.496 1.436,67.734 1.623,67.962 1.824,68.176 2.038,68.377 2.266,68.564 2.504,68.735 2.754,68.89 3.013,69.029 3.281,69.15 3.556,69.253 3.837,69.339 4.124,69.406 4.414,69.453 4.706,69.482 4.982,69.491 5,69.49 88,69.49 88.018,69.491

## Other copper
Top Layer:
  rectangle net 3V3: 53.5,36.8 54.586,38.05
  rectangle net 3V3: 53.53,35.038 54.586,36.6
  rectangle net GND: 44.35,33.25 45.408,34.635
  rectangle net GND: 54.946,36.046 56.554,37.554
  rectangle net GND: 43.546,34.65 44.6,36.104
  rectangle net GND: 47.146,37.9 49.15,39.4
  rectangle net GND: 26.396,38.95 27.85,40.354
  rectangle net GND: 62.8,38.525 63.95,39.1
  rectangle net GND: 76.341,44.244 77.4,44.55
  rectangle net NetC66_2: 73.4,45.9 74.15,46.4
  rectangle net GND: 46.041,33.702 46.455,34.613
  rectangle net GND: 44.994,33.724 45.408,34.635
  rectangle net GND: 44.4,32.026 47.532,32.55
  rectangle net GND: 44.5,33.25 46.933,33.548
  rectangle net GND: 74.464,43.6 75.35,46.058
  rectangle net GND: 81.25,43.2 82.65,44.4
  rectangle net GND: 11.05,25.65 12.45,26.85
  rectangle net GND: 10.95,36 12.35,37.2
  rectangle net GND: 10.65,46.15 12.05,47.35
  rectangle net GND: 76.7,43.65 77.4,44.55
  rectangle net GND: 44.4,31.842 47.115,32.026
  rectangle net GND: 42.65,30.792 44.45,32.035
  rectangle net GND: 48.65,34.4 50,36
  rectangle net GND: 54.096,41.9 58.35,42.854
  rectangle net GND: 54.096,39 58.55,40.3
  pour cut-out: 19.65,22.1 20.5,22.1 20.425,22.025 20.425,19.435 19.567,19.435 19.521,19.389 18.995,19.915 18.995,22.1
  pour cut-out: 16.712,22.1 19.65,22.1 19.521,21.971 19.521,19.389 16.81,19.389 16.69,19.51 16.712,19.532
  pour cut-out: 46.6,39.613 46.73,39.743 49,39.743 49,39.5 48.9,39.4 46.568,39.4
  pour cut-out: 46.386,37.626 46.75,37.626 46.75,34.886 46.644,34.992 46.4,34.992 46.4,37.576 46.376,37.6
  pour cut-out: 54.741,38.3 54.791,38.35 54.951,38.19 54.951,35.109 53.194,35.109 53.102,35.2 53.109,35.206 53.109,38.3
  pour cut-out: 58.654,36.104 58.658,36.1 60.1,36.1 60.1,33.92 60.228,33.792 60.186,33.75 58.7,33.75 58.7,35.954 58.654,36
  region net GND: 44.35,33.75 44.35,33.25 44.9,33.25 44.95,33.3
  region net GND: 46.933,33.25 47,33.25 47.144,33.394 47.144,33.906 46.822,33.906 46.786,33.942
  region net GND: 47.532,32.55 47.642,32.55 47.749,32.443 47.532,32.178

## Silkscreen, mask and mechanical layers (free items; w line width, h text height)
Top Overlay:
  text "Electrosense 1.5-6GHz Wideband downconverter v1.5" at 18.4,66.35 h3
  text "GND" at 20.1,7.5 h1.52
  text "SCL" at 20,5.35 h1.52
  text "SDA" at 19.9,3.3 h1.52
  text "Sofie Pollin" at 58.6,0.75 h2.5
  text "Bertold Van den Bergh" at 7.1,0.65 h2.5
  text "Franco Minucci" at 37.85,0.55 h2.5
Top Paste:
  rectangle: 62.85,40.3 63.95,40.825
  rectangle: 62.25,40.8 64.5,43.6
  rectangle: 23.35,33 24.25,33.725
  rectangle: 22.95,33.5 24.7,36.05
Top Solder:
  rectangle: 22.95,33.5 24.7,36.05
  rectangle: 23.25,31.225 24.35,33.525
  rectangle: 62.25,40.8 64.5,43.55
  rectangle: 62.85,38.525 63.95,40.825
  rectangle: 62.8,37.8 64,39.1